# EAGLE board STM32f407layout_nonintegrated (EAGLE 7.5.0)
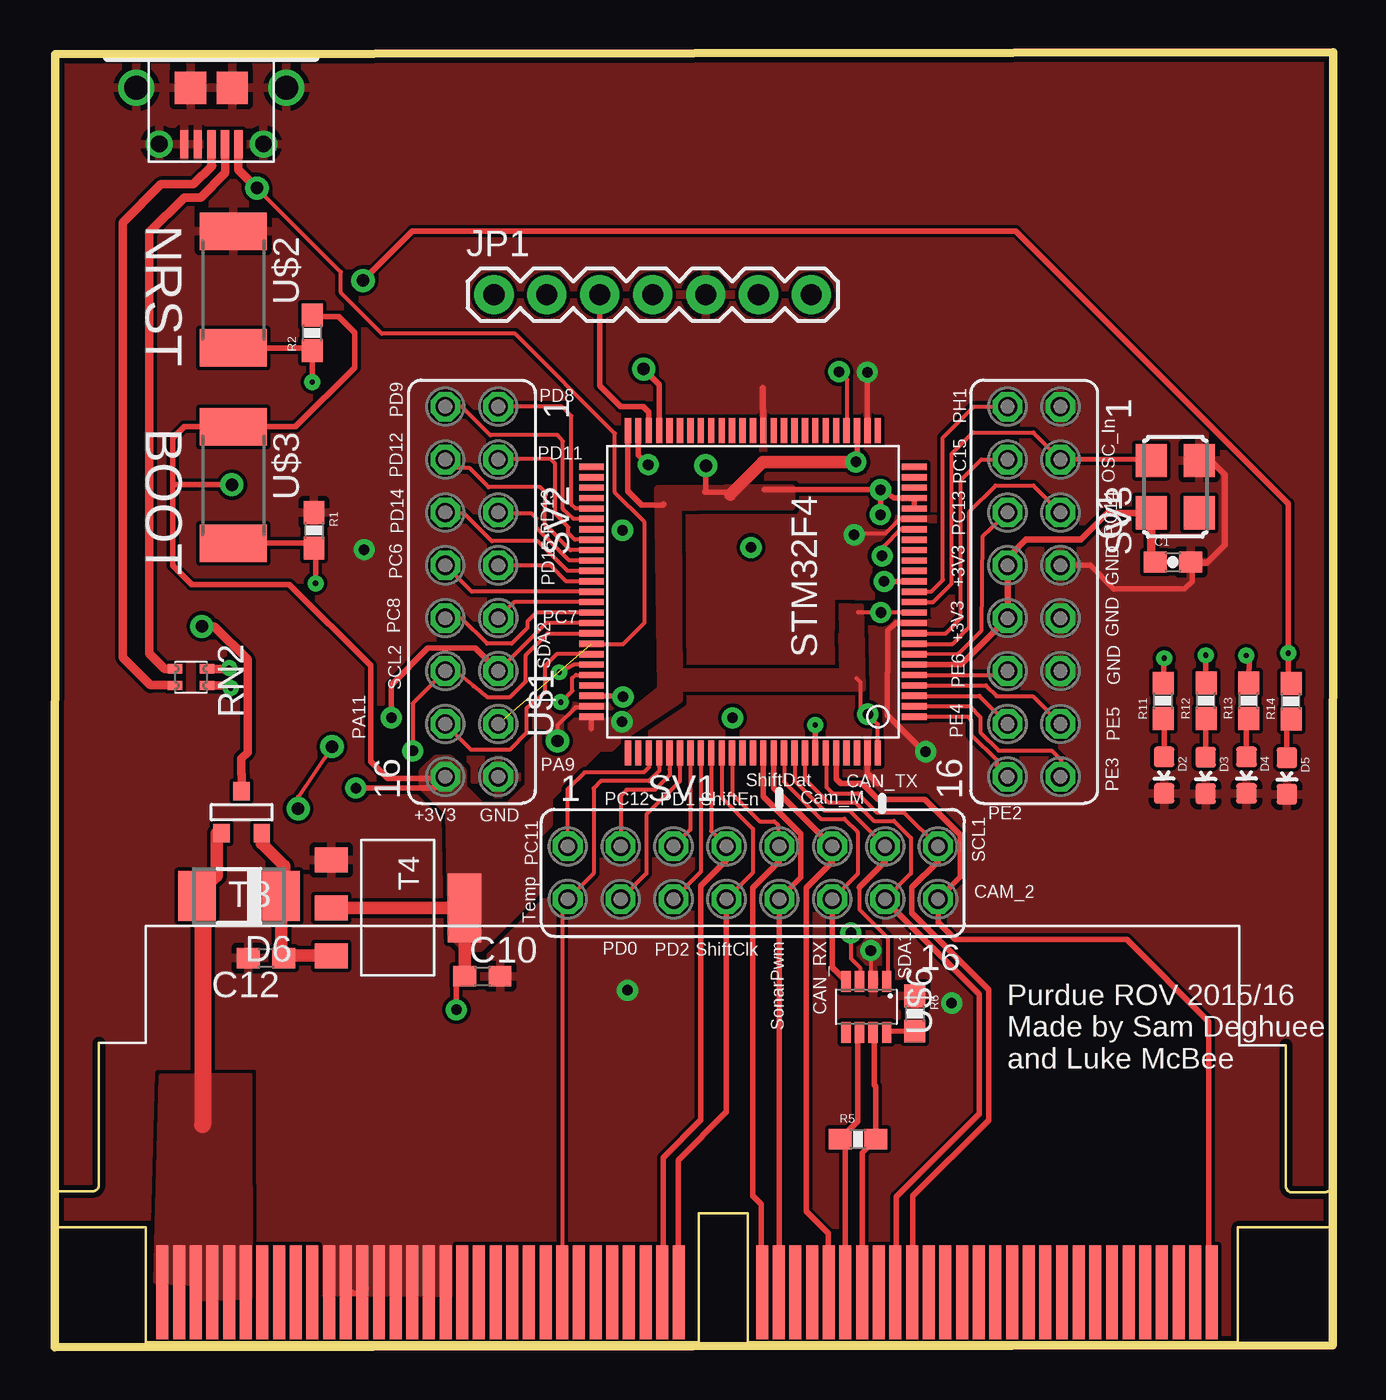
[diagram p0: board, top side]
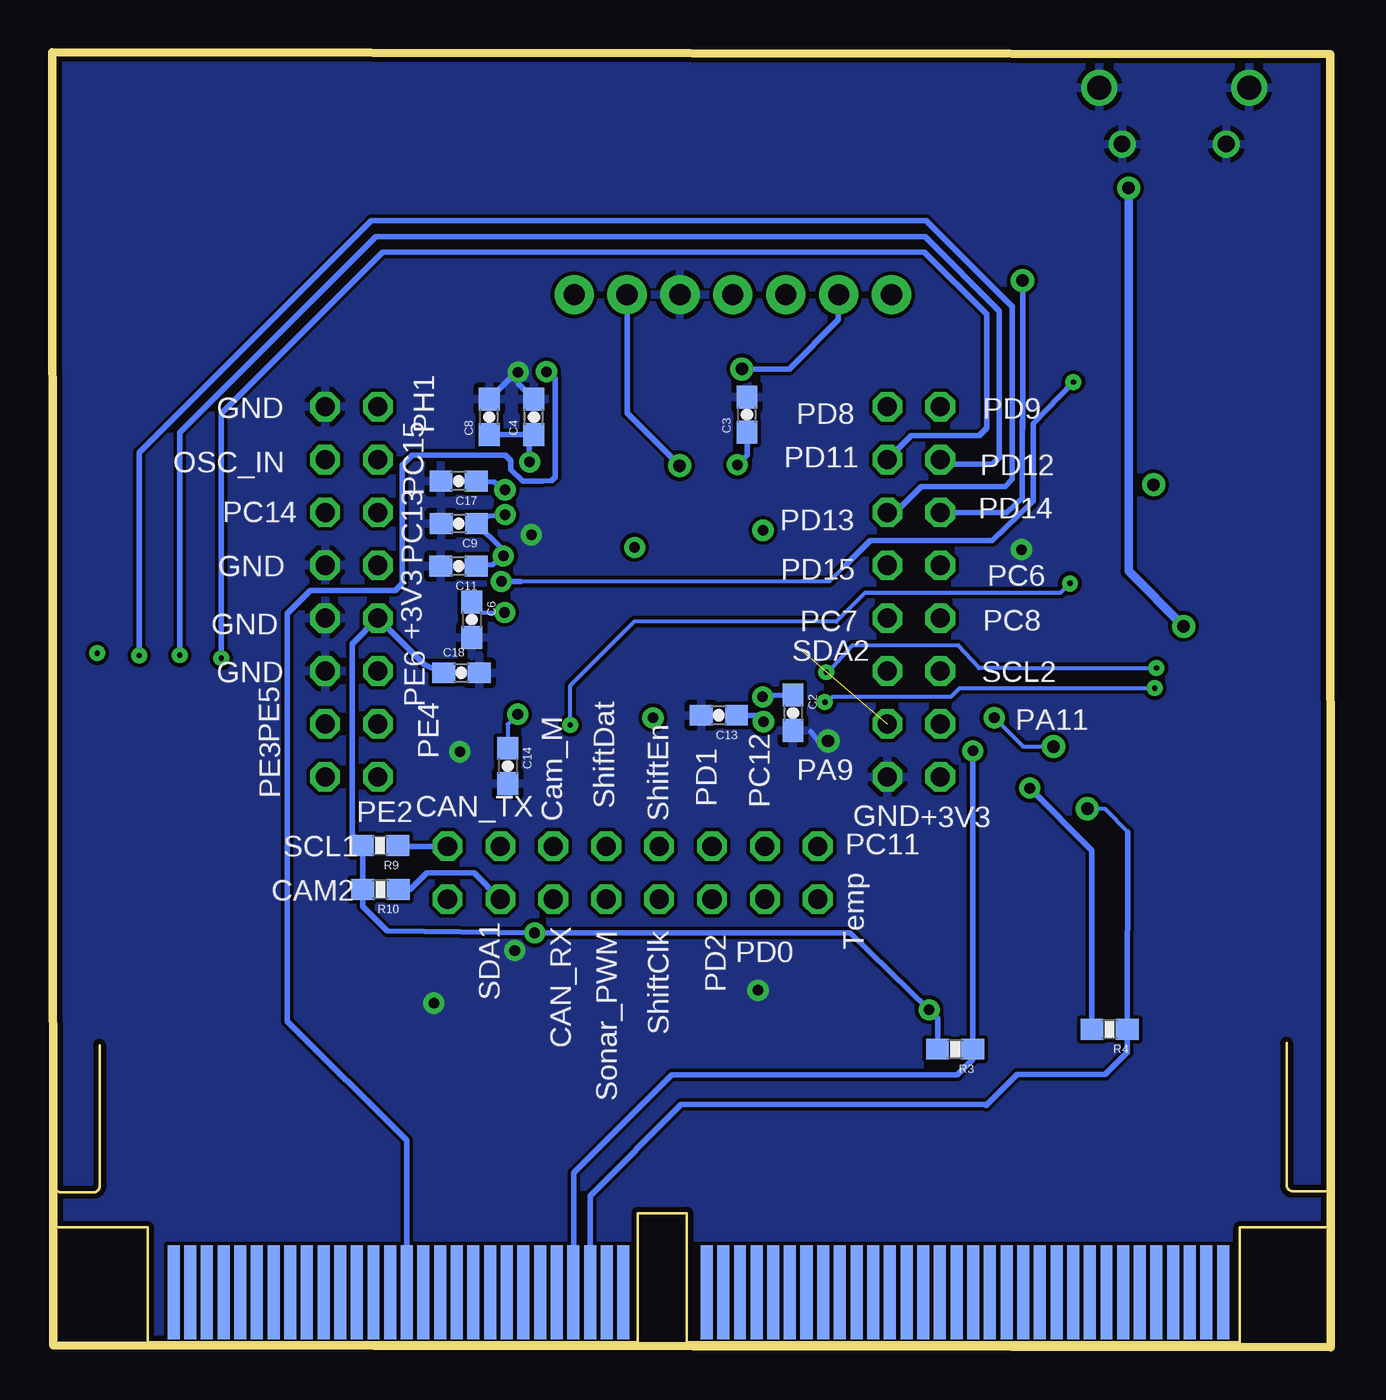
[diagram p1: board, bottom side, seen from below]

Size 61.4 x 62.23 mm. Coordinates in mm from the lower left corner, seen from the top.
Outline: 0,0 0.02,62.13 61.4,62.23 61.36,0.1 0,0
Copper layers (1*16): Top 0.035mm / dielectric 1.5mm / Bottom 0.035mm
Design rules "GoldPhoenix": minimum track width 7mil, minimum drill 10mil, track to track 7mil, track to pad 7mil, pad to pad 7mil, via to via 7mil, smd to smd 7mil, copper to edge 10mil, drill to drill 8mil, minimum pad ring 10mil, minimum via ring 10mil, stop-mask expansion 4mil, vias tented up to drill 25mil, thermal gap 10mil
Net classes: 1 DiffPair: width 0.254 mm

## Footprints (pad centres in the part's own frame; a part is rotated, then mirrored left to right if it is on the bottom)
0603-CAP = smd 1.1 x 1: 1 -0.85,0; 2 0.85,0
C0603 = smd 1.1 x 1: 1 -0.85,0; 2 0.85,0
LED-0603 = smd 1 x 1: A 0,-0.877; C 0,0.877
DO-214AC = smd 1.8 x 2.4: A 2.025,0; C -2.025,0
1X07 = drill 1.016 pad 1.88: 1 0,0; 2 2.54,0; 3 5.08,0; 4 7.62,0; 5 10.16,0; 6 12.7,0; 7 15.24,0
ASF = smd 1.6 x 1.5: 1 -1.25,-1.15; 2 1.25,-1.15; 3 1.25,1.15; 4 -1.25,1.15
0603-RES = smd 1.1 x 1: 1 -0.85,0; 2 0.85,0
EXBV4V = smd 0.45 x 0.7: 1 -0.4,-0.775; 2 0.4,-0.775; 3 0.4,0.775; 4 -0.4,0.775
FE08-2 = drill 0.914 octagon: 1 -8.89,1.27; 2 -8.89,-1.27; 3 -6.35,1.27; 4 -6.35,-1.27; 5 -3.81,1.27; 6 -3.81,-1.27; 7 -1.27,1.27; 8 -1.27,-1.27; 9 1.27,1.27; 10 1.27,-1.27; 11 3.81,1.27; 12 3.81,-1.27; 13 6.35,1.27; 14 6.35,-1.27; 15 8.89,1.27; 16 8.89,-1.27
SOT-23 = smd 0.787 x 0.889: 1 0.025,-1.016; 2 -0.94,1.016; 3 0.991,1.016
SOT223 = smd 1.2 x 1.6: GND -2.3,-3.2; VIN 2.3,-3.2; VOUT 0,-3.2 | smd 3.3 x 1.6: TAB 0,3.2
LQFP100 = smd 0.3 x 1.2: P1 -6,-7.75; P2 -5.5,-7.75; P3 -5,-7.75; P4 -4.5,-7.75; P5 -4,-7.75; P6 -3.5,-7.75; P7 -3,-7.75; P8 -2.5,-7.75; P9 -2,-7.75; P10 -1.5,-7.75; P11 -1,-7.75; P12 -0.5,-7.75; P13 0,-7.75; P14 0.5,-7.75; P15 1,-7.75; P16 1.5,-7.75; P17 2,-7.75; P18 2.5,-7.75; P19 3,-7.75; P20 3.5,-7.75; P21 4,-7.75; P22 4.5,-7.75; P23 5,-7.75; P24 5.5,-7.75; P25 6,-7.75; P51 6,7.75; P52 5.5,7.75; P53 5,7.75; P54 4.5,7.75; P55 4,7.75; P56 3.5,7.75; P57 3,7.75; P58 2.5,7.75; P59 2,7.75; P60 1.5,7.75; P61 1,7.75; P62 0.5,7.75; P63 0,7.75; P64 -0.5,7.75; P65 -1,7.75; P66 -1.5,7.75; P67 -2,7.75; P68 -2.5,7.75; P69 -3,7.75; P70 -3.5,7.75; P71 -4,7.75; P72 -4.5,7.75; P73 -5,7.75; P74 -5.5,7.75; P75 -6,7.75 | smd 1.2 x 0.3: P26 7.75,-6; P27 7.75,-5.5; P28 7.75,-5; P29 7.75,-4.5; P30 7.75,-4; P31 7.75,-3.5; P32 7.75,-3; P33 7.75,-2.5; P34 7.75,-2; P35 7.75,-1.5; P36 7.75,-1; P37 7.75,-0.5; P38 7.75,0; P39 7.75,0.5; P40 7.75,1; P41 7.75,1.5; P42 7.75,2; P43 7.75,2.5; P44 7.75,3; P45 7.75,3.5; P46 7.75,4; P47 7.75,4.5; P48 7.75,5; P49 7.75,5.5; P50 7.75,6; P76 -7.75,6; P77 -7.75,5.5; P78 -7.75,5; P79 -7.75,4.5; P80 -7.75,4; P81 -7.75,3.5; P82 -7.75,3; P83 -7.75,2.5; P84 -7.75,2; P85 -7.75,1.5; P86 -7.75,1; P87 -7.75,0.5; P88 -7.75,0; P89 -7.75,-0.5; P90 -7.75,-1; P91 -7.75,-1.5; P92 -7.75,-2; P93 -7.75,-2.5; P94 -7.75,-3; P95 -7.75,-3.5; P96 -7.75,-4; P97 -7.75,-4.5; P98 -7.75,-5; P99 -7.75,-5.5; P100 -7.75,-6
SW_2512 = smd 1.8 x 3.2: 1 -2.8,0; 2 2.8,0
MICRO_B = smd 1.5 x 1.55: GND1 -1,1.45; GND2 1,1.45 | drill 0.8: GND3 -2.5,4.15; GND4 2.5,4.15 | drill 1.15: GND7 -3.598,1.45; GND8 3.598,1.45 | smd 0.4 x 1.35: P1 -1.3,4.15; P2 -0.65,4.15; P3 0,4.15; P4 0.65,4.15; P5 1.3,4.15
SOT23-8L = smd 0.45 x 1: 1 -0.975,-1.225; 2 -0.325,-1.225; 3 0.325,-1.225; 4 0.975,-1.225; 5 0.975,1.225; 6 0.325,1.225; 7 -0.325,1.225; 8 -0.975,1.225
HSC8-60PINOUUT = smd 0.575 x 4.5 bottom: B1 0.8,2.4; B2 1.6,2.4; B3 2.4,2.4; B4 3.2,2.4; B5 4,2.4; B6 4.8,2.4; B7 5.6,2.4; B8 6.4,2.4; B9 7.2,2.4; B10 8,2.4; B11 8.8,2.4; B12 9.6,2.4; B13 10.4,2.4; B14 11.2,2.4; B15 12,2.4; B16 12.8,2.4; B17 13.6,2.4; B18 14.4,2.4; B19 15.2,2.4; B20 16,2.4; B21 16.8,2.4; B22 17.6,2.4; B23 18.4,2.4; B24 19.2,2.4; B25 20,2.4; B27 21.6,2.4; B28 22.4,2.4; B29 23.2,2.4; B30 24,2.4; B31 24.8,2.4; B32 25.6,2.4; B33 29.6,2.4; B34 30.4,2.4; B35 31.2,2.4; B36 32,2.4; B37 32.8,2.4; B38 33.6,2.4; B39 34.4,2.4; B40 35.2,2.4; B41 36,2.4; B42 36.8,2.4; B43 37.6,2.4; B44 38.4,2.4; B45 39.2,2.4; B46 40,2.4; B47 40.8,2.4; B48 41.6,2.4; B49 42.4,2.4; B50 43.2,2.4; B51 44,2.4; B52 44.8,2.4; B53 45.6,2.4; B54 46.4,2.4; B55 47.2,2.4; B56 48,2.4; B57 48.8,2.4; B58 49.6,2.4; B59 50.4,2.4; B60 51.2,2.4 | smd 0.6 x 4.5 bottom: B26 20.8,2.4 | smd 0.575 x 4.5: T1 0.8,2.4; T2 1.6,2.4; T3 2.4,2.4; T4 3.2,2.4; T5 4,2.4; T6 4.8,2.4; T7 5.6,2.4; T8 6.4,2.4; T9 7.2,2.4; T10 8,2.4; T11 8.8,2.4; T12 9.6,2.4; T13 10.4,2.4; T14 11.2,2.4; T15 12,2.4; T16 12.8,2.4; T17 13.6,2.4; T18 14.4,2.4; T19 15.2,2.4; T20 16,2.4; T21 16.8,2.4; T22 17.6,2.4; T23 18.4,2.4; T24 19.2,2.4; T25 20,2.4; T26 20.8,2.4; T27 21.6,2.4; T28 22.4,2.4; T29 23.2,2.4; T30 24,2.4; T31 24.8,2.4; T32 25.6,2.4; T33 29.6,2.4; T34 30.4,2.4; T35 31.2,2.4; T36 32,2.4; T37 32.8,2.4; T38 33.6,2.4; T39 34.4,2.4; T40 35.2,2.4; T41 36,2.4; T42 36.8,2.4; T43 37.6,2.4; T44 38.4,2.4; T45 39.2,2.4; T46 40,2.4; T47 40.8,2.4; T48 41.6,2.4; T49 42.4,2.4; T50 43.2,2.4; T51 44,2.4; T52 44.8,2.4; T53 45.6,2.4; T54 46.4,2.4; T55 47.2,2.4; T56 48,2.4; T57 48.8,2.4; T58 49.6,2.4; T59 50.4,2.4; T60 51.2,2.4

## Placement (x,y rotation side)
C1  [0603-CAP]  53.69,37.73 0 top
C2  0.22uF  [0603-CAP]  25.83,30.49 270 bottom
C3  0.22uF  [0603-CAP]  28.03,44.81 90 bottom
C4  0.1uF  [0603-CAP]  38.26,44.71 90 bottom
C6  0.1uF  [0603-CAP]  41.25,34.96 270 bottom
C8  4.7uF  [0603-CAP]  40.41,44.7 90 bottom
C9  0.1uF  [0603-CAP]  41.87,39.58 180 bottom
C10  0.22uF  [C0603]  20.53,17.83 0 top
C11  0.1uF  [0603-CAP]  41.88,37.53 180 bottom
C12  0.22uF  [C0603]  10.15,18.7 180 top
C13  0.1uF  [0603-CAP]  29.39,30.37 180 bottom
C14  0.1uF  [0603-CAP]  39.52,27.94 270 bottom
C17  1uF  [0603-CAP]  41.88,41.62 180 bottom
C18  0.1uF  [0603-CAP]  41.74,32.41 0 bottom
D2  [LED-0603]  53.27,27.5 180 top
D3  [LED-0603]  55.27,27.48 180 top
D4  [LED-0603]  57.22,27.5 180 top
D5  [LED-0603]  59.17,27.45 180 top
D6  [DO-214AC]  8.84,21.69 180 top
JP1  [1X07]  21.09,50.58 0 top
Q1  ASF  [ASF]  53.81,41.35 90 top
R1  10k  [0603-RES]  12.44,39.26 270 top
R2  10k  [0603-RES]  12.36,48.74 90 top
R3  4.7K  [0603-RES]  18.03,14.33 180 bottom
R4  4.7K  [0603-RES]  10.61,15.29 180 bottom
R5  120  [0603-RES]  38.57,10.01 0 top
R6  100K  [0603-RES]  41.29,16.05 270 top
R9  4.7K  [0603-RES]  45.64,24.11 180 bottom
R10  4.7K  [0603-RES]  45.63,22.01 180 bottom
R11  200  [0603-RES]  53.23,31.06 90 top
R12  200  [0603-RES]  55.29,31.07 90 top
R13  200  [0603-RES]  57.33,31.07 90 top
R14  200  [0603-RES]  59.37,31.05 90 top
RN2  [EXBV4V]  6.54,32.2 270 top
SV1  [FE08-2]  33.52,22.81 0 top
SV2  [FE08-2]  20.02,36.31 270 top
SV3  [FE08-2]  47.02,36.31 270 top
T3  FDN340P  [SOT-23]  9,25.72 180 top
T4  AP1117_LIN_REG  [SOT223]  16.47,21.12 270 top
U$1  STM32F4  [LQFP100]  33.52,36.31 90 top
U$2  SWITCH  [SW_2512]  8.56,50.82 270 top
U$3  SWITCH  [SW_2512]  8.56,41.43 270 top
U$5  MICROUSB  [MICRO_B]  7.52,61.96 180 top
U$6  MAX3051MAX3051  [SOT23-8L]  38.97,16.37 180 top
U$8  HSC8PART-60  [HSC8-60PINOUUT]  4.37,0.25 0 top

## Library data of the parts
C1-C4 C6 C8 C9 C11 C13 C14 C17 C18 R1-R6 R9-R14 = SparkFun-Passives
C10 C12 = rcl
D2-D5 = SparkFun-LED
D6 U$2 U$3 = DiscreteComponents
JP1 U$8 = Connectors
Q1 = DiscreteComponents; DIGIKEY: 535-10066-1-ND
RN2 = DiscreteComponents; DIGIKEY: RHM1381CT-ND; MF: Rohm Semiconductor; MPN: MNR12ERAPJ220
SV1-SV3 = con-lsta; OC_FARNELL: unknown; OC_NEWARK: unknown
T3 = DiscreteComponents; DIGIKEY: FDN340PCT-ND
T4 = PowerComponents
U$1 U$5 = Other
U$6 = MAX3051 Library

## Nets
+3V3: C1.1 C4.1 C6.1 C8.1 C9.1 C10.1 C11.1 C13.1 C14.1 C17.1 C18.1 JP1.6 Q1.4 R2.2 R3.2 R4.2 R9.2 R10.2 SV2.16 SV3.8 SV3.10 T4.TAB T4.VOUT U$1.P6 U$1.P11 U$1.P19 U$1.P21 U$1.P22 U$1.P28 U$1.P50 U$1.P75 U$1.P100 U$3.1 U$6.3
+5V: D6.A T3.3 U$8.T1 U$8.T2 U$8.T3 U$8.T4 U$8.T5 U$8.T6
ALT_CAMERA_SERVO_MOTOR_PWM: SV1.16 U$1.P96 U$8.T60
CAN_RX: SV1.12 U$1.P91 U$6.4
CAN_TX: SV1.13 U$1.P92 U$6.1
CANH1: R5.2 U$6.7 U$8.T39
CANL1: R5.1 U$6.6 U$8.T38
CFG: JP1.1
CRS_DV: U$1.P32
GND: C1.2 C2.2 C3.2 C4.2 C6.2 C8.2 C9.2 C10.2 C11.2 C12.2 C13.2 C14.2 C17.2 C18.2 D2.C D3.C D4.C D5.C JP1.5 Q1.2 R1.1 R6.1 SV2.15 SV3.1 SV3.7 SV3.9 SV3.11 T4.GND U$1.P10 U$1.P20 U$1.P27 U$1.P37 U$1.P74 U$1.P99 U$2.1 U$5.GND1 U$5.GND2 U$5.GND3 U$5.GND4 U$5.GND7 U$5.GND8 U$5.P4 U$5.P5 U$6.2 U$8.T11 U$8.T12 U$8.T13 U$8.T14 U$8.T15 U$8.T16 U$8.T17 U$8.T18
I2C1_SCL: R9.1 SV1.15 U$1.P95 U$8.T42
I2C1_SDA: R10.1 SV1.14 U$1.P93 U$8.T41
I2C3_SCL: R3.1 SV2.12 U$1.P67 U$8.B36
I2C3_SDA: R4.1 SV2.11 U$1.P66 U$8.B35
MAIN_CAMERA_SERVO_MOTOR_PWM: SV1.11 U$1.P90 U$8.T37
N$1: C2.1 U$1.P73
N$2: C3.1 U$1.P49
N$3: R1.2 U$1.P94 U$3.2
N$4: R2.1 U$1.P14 U$2.2
N$11: R6.2 U$6.8
N$12: RN2.1 U$5.P2
N$14: D3.A R12.1
N$15: D5.A R14.1
N$17: D4.A R13.1
N$18: D2.A R11.1
N$24: RN2.2 U$5.P3
N$58: C12.1 D6.C T3.2 T4.VIN
OSC_IN: Q1.3 SV3.3 U$1.P12
PA0: U$1.P23
PA3: U$1.P26
PA5: U$1.P30
PA6: U$1.P31
PA10: SV2.14 U$1.P69
PA13: U$1.P72
PA14: U$1.P76
PA15: U$1.P77
PB0: U$1.P35
PB1: U$1.P36
PB14: U$1.P53
PB15: U$1.P54
PC0: U$1.P15
PC2: U$1.P17
PC3: U$1.P18
PC6: SV2.8 U$1.P63
PC7: SV2.9 U$1.P64
PC8: SV2.10 U$1.P65
PC10: SV1.1 U$1.P78
PC12: SV1.3 U$1.P80
PC13: SV3.6 U$1.P7
PC14: SV3.5 U$1.P8
PC15: SV3.4 U$1.P9
PD0: SV1.4 U$1.P81
PD1: SV1.5 U$1.P82
PD2: SV1.6 U$1.P83
PD6: U$1.P87
PD7: U$1.P88
PD8: SV2.1 U$1.P55
PD9: SV2.2 U$1.P56
PD10: U$1.P57
PD11: R11.2 SV2.3 U$1.P58
PD12: R12.2 SV2.4 U$1.P59
PD13: R13.2 SV2.5 U$1.P60
PD14: R14.2 SV2.6 U$1.P61
PD15: SV2.7 U$1.P62
PE0: U$1.P97
PE1: U$1.P98
PE2: SV3.16 U$1.P1
PE3: SV3.15 U$1.P2
PE4: SV3.14 U$1.P3
PE5: SV3.13 U$1.P4
PE6: SV3.12 U$1.P5
PE7: U$1.P38
PE8: U$1.P39
PE9: U$1.P40
PE10: U$1.P41
PE11: U$1.P42
PE12: U$1.P43
PE13: U$1.P44
PE14: U$1.P45
PE15: U$1.P46
PH1: SV3.2 U$1.P13
RST_ETH: JP1.4
RXD0: U$1.P33
RXD1: U$1.P34
SHIFTREG_CLK: SV1.8 U$1.P85 U$8.T32
SHIFTREG_DATA: SV1.9 U$1.P86 U$8.T33
SHIFTREG_ENABLE: SV1.7 U$1.P84 U$8.T31
SONAR_DAC: U$1.P29 U$8.B46
SONAR_PWM: SV1.10 U$1.P89 U$8.T34
TEMP_BACKUP: SV1.2 U$1.P79 U$8.T25
USART3_RX: JP1.3 U$1.P48
USART3_TX: JP1.2 U$1.P47
USB_D+: RN2.3 U$1.P71
USB_D-: RN2.4 U$1.P70
USBPWR: SV2.13 T3.1 U$1.P68 U$5.P1
VDD_ETH: JP1.7

## Tracks (layer width: path | path; a pad name or v marks a point on that pad's centre or on a via)
+3V3  (via drill 0.51, 0.6)
  Top 0.203: v38.23,19.92 38.22,18.68 38.67,18.24 38.67,17.61 U$6.3 | U$1.P19 40.63,39.31 39.8,38.48 39.76,38.23 v39.73,38.02 | U$1.P100 39.52,29.93 v39.04,30.42 38.7,30.76 38.69,30.76 38.69,31.95 38.49,32.15 | U$1.P11 41.26,35.31 v39.67,35.31 v39.66,35.31 38.56,35.31
  Top 0.254: U$1.P75 25.75,30.31 25.75,29.74 | U$1.P50 27.5,42.89 27.5,41.15 28.18,40.47 29.19,40.47 29.24,40.51 | 5.67,41.53 5.67,43.68 6.22,44.23 U$3.1 11.55,44.23 14.4,47.08 14.4,48.75 13.63,49.52 12.43,49.52 R2.2 | 5.67,41.53 5.67,37.57 6.58,36.65 11.26,36.65 15.16,32.75 15.16,28.16 15.99,27.33 18.67,27.33 SV2.16 18.21,26.88 v14.45,26.88 | v39.65,41.2 39.71,41.16 39.75,41.17 40.31,40.81 U$1.P22 U$1.P21 | U$1.P28 38.52,42.56 v38.47,42.54 | v19.29,16.22 19.29,17.44 C10.1 | v8.5,41.45 5.74,41.45 5.67,41.53 | U$1.P6 43.52,32.81 SV3.10 | v39.64,40.01 39.65,40.12 v39.65,41.2 | 34.06,41.2 v39.65,41.2 | v31.26,42.36 31.26,41.14 31.22,41.1 32.31,41.1 32.44,40.97
  Top 0.305: Q1.4 50.55,40.08 49.28,38.81 46.63,38.81 45.75,37.93 SV3.8 SV3.10
  Top 0.406: Q1.4 52.66,37.92 C1.1
  Top 0.61: T4.VOUT T4.TAB C10.1 | v38.47,42.54 34,42.54 32.44,40.97
  Bottom 0.203: v39.04,30.42 39.53,29.94 C14.1 | C6.1 40.75,35.31 v39.67,35.31
  Bottom 0.254: v38.47,42.54 38.52,43.8 C4.1 C8.1 | C17.1 40.16,41.56 v39.65,41.2 | C13.1 27.55,30.37 v27.23,30.06 | R4.2 11.46,23.89 v14.45,26.88 | C11.1 40.25,37.61 v39.73,38.02 39.84,38.4 C9.1 40.68,39.92 v39.64,40.01 | R3.2 18.88,15.82 v19.29,16.22 23.08,19.92 v38.23,19.92 45.3,20.01 46.49,21.2 R10.2 R9.2 46.99,24.61 46.99,33.8 SV3.10 43.52,32.81 C18.1 | JP1.6 33.79,44.89 v31.26,42.36
  pour Top (no thermals): 18.94,25.69 17.68,26.95 17.68,27.64 18.32,28.28 18.96,28.28 19.58,27.66 19.58,26.88 20.45,26.01 21.82,26.01 22.76,26.95 22.76,28.9 23.79,29.93 23.79,29.93 24.16,30.07 26.55,30.04 27.54,30.35 29.11,31.63 28.98,41.24 35.37,41.29 35.37,40.4 31.37,40.41 30.24,40.38 29.91,40.4 29.95,31.12 27.48,29.5 27.37,29.5 26.7,28.83 26.13,28.83 23.72,26.43 23.72,25.14 23.13,24.55 23.13,21.91 20.4,19.19 19.69,19.19 19.03,19.85 19.03,21.09
  pour Top: 29.78,31.62 38.87,31.62 38.77,35.62 37.71,35.66 37.73,34.19 37.69,34.25 37.74,32.51 29.76,32.51 29.76,31.61
+5V
  Top 0.254: D6.A | T3.3 7.78,24.7
  Top 0.61: 7.78,24.7 7.78,22.65 D6.A
  Top 0.813: D6.A 7.09,21.69 7.09,10.71
  pour Top (no thermals): 6.84,2.34 9.38,2.42 9.35,13.06 5.12,13.02 4.85,3.17 6.78,3.06 6.81,2.4
ALT_CAMERA_SERVO_MOTOR_PWM
  Top 0.254: U$1.P96 37.52,27.3 37.74,27.09 38.76,27.09 39.54,26.32 41.79,26.32 43.49,24.61 43.49,22.61 SV1.16 42.41,20.42 43.24,19.59 51.47,19.59 55.42,15.64 55.42,2.79 U$8.T60
CAN_RX
  Top 0.203: U$1.P91 35.02,27.17 36.79,25.4 37.91,25.4 38.55,24.76 38.55,22.76 SV1.12
  Top 0.254: SV1.12 37.33,18.26 U$6.4
CAN_TX
  Top 0.203: U$1.P92 35.52,27.22 36.95,25.79 38.16,25.79 SV1.13 | 38.64,22.11 38.64,21.04 40,19.68 40,17.65 U$6.1
  Top 0.254: SV1.13 39.87,23.34 38.64,22.11 | 39.92,17.62 U$6.1
CANH1
  Top 0.254: U$6.7 39.35,15.09 39.35,12.61 39.42,12.54 R5.2 38.77,9.36 U$8.T39
CANL1
  Top 0.254: U$6.6 38.56,15.05 38.56,10.85 R5.1 37.97,9.76 U$8.T38
GND  (via drill 0.51, 0.6)
  Top 0.203: v39.18,19.07 39.18,17.71 U$6.2 | U$1.P74 25.72,30.75 25.01,30.75 24.14,29.88 v24.14,29.14 | U$1.P20 40.59,39.81 39.88,39.11 38.45,39.1 v38.38,39.04
  Top 0.254: SV3.7 49.72,37.58 50.86,36.44 54.27,36.46 54.62,36.8 54.62,37.66 C1.2 | U$1.P99 39.02,27.61 39.05,27.57 39.05,27.55 C14.2 | 38.4,39.05 v38.38,39.04 | U$1.P27 39.01,46.15 v39.02,46.85 | U$1.P10 40.37,34.81 40.01,34.44 39.97,30.39 41.54,28.82 | 14.29,2.65 14.29,2.66 | 14.96,2.84 14.73,2.61 14,2.61 13.82,2.79 13.82,2.65 13.91,2.56 | 15.72,2.65 15.61,2.54 15.52,2.54 15.47,2.59 15.5,2.59 15.55,2.64 | 13.91,2.65 13.9,2.65 13.98,2.65 13.99,2.67 13.92,2.67 13.88,2.71
  Top 0.305: Q1.2 55.5,42.6 56.18,41.92 56.18,38.54 55.35,37.71 54.56,37.71 C1.2 | U$1.P37 33.99,46.08
  Bottom 0.254: v38.38,39.04 38.38,38.69 38.37,38.68 | v24.14,29.14 24.62,29.14 24.96,29.59 | C8.2 39.23,46.73 39.23,46.78 v39.02,46.85 39.02,46.31 C4.2
  other vias: 14.85,38.32 41.82,28.62 27.5,17.16 43.07,16.54
  pour Bottom (rank 6): -0.01,0.13 61.26,0.16 61.37,62.4 -0.08,62.38
  pour Top (rank 6): 61.34,0.12 61.37,62.3 -0.04,62.21 -0.07,0.16
  pour Top: 13.17,2.71 16.25,2.58 16.53,2.86
  pour Top (no thermals): 13.22,2.65 19.23,2.52 19.23,8.78 12.85,8.83 12.85,2.58
I2C1_SCL
  Top 0.203: SV1.15 40.78,25.71 39.47,25.71 38.56,26.61 37.36,26.61 37.05,26.92 37.05,28.53 U$1.P95
  Top 0.254: SV1.15 42.41,23.36 41.15,22.1 41.15,20.87 44.85,17.18 44.85,10.92 41.2,7.28 41.2,2.69 U$8.T42
  Bottom 0.254: R9.1 44.75,24.07 SV1.15
I2C1_SDA
  Top 0.203: U$1.P93 36.02,27.3 37.14,26.19 38.44,26.19 39.32,25.3 40.29,25.3 41.11,24.48 41.11,22.77 SV1.14
  Top 0.254: SV1.14 39.87,21.47 44.39,16.95 44.39,11.22 40.4,7.23 40.4,2.69 U$8.T41
  Bottom 0.254: R10.1 44.2,22.01 43.41,22.8 41.14,22.8 SV1.14
I2C3_SCL  (via drill 0.51)
  Top 0.203: U$1.P67 23.66,34.3 22.61,33.25 22.61,31.99 22.6,31.98 22.58,31.98 21.84,31.23 20.79,31.23 20.11,31.77 19.18,32.51 SV2.12 17.19,30.93 v17.19,28.66
  Bottom 0.254: v17.19,28.66 17.18,28.93 R3.1 17.18,13.83 17.92,13.09 31.65,13.09 36.36,8.39 U$8.B36 36.32,2.92
I2C3_SDA  (via drill 0.51, 0.6)
  Top 0.203: U$1.P66 23.6,34.81 SV2.11 | v13.31,28.87 11.69,26.45 v11.69,25.88
  Top 0.254: v16.16,30.25 16.15,31.84 17.91,33.6 20.19,33.6 SV2.11
  Bottom 0.203: v11.69,25.88 10.85,25.88 9.74,24.77 | v16.16,30.25 14.77,28.87 v13.31,28.87
  Bottom 0.254: 9.74,24.77 R4.1 9.76,14.18 10.82,13.12 15.05,13.12 16.55,11.63 16.59,11.67 31.19,11.67 35.57,7.29 U$8.B35
MAIN_CAMERA_SERVO_MOTOR_PWM
  Top 0.254: U$1.P90 34.52,26.89 SV1.11 37.33,23.33 36.09,22.09 36.09,6.55 37.14,5.5 37.14,2.68 U$8.T37
N$1  (via drill 0.51)
  Top 0.254: U$1.P73 26.99,31.31 v27.28,31.25
  Bottom 0.254: C2.1 27.01,31.33 v27.28,31.25
N$2  (via drill 0.51)
  Top 0.254: U$1.P49 28.02,42.88 v28.5,42.41
  Bottom 0.254: v28.5,42.41 28.03,42.87 C3.1
N$3  (via drill 0.25)
  Top 0.254: U$1.P94 v36.52,29.9 | U$3.2 12.45,38.63 R1.2 12.52,38.33 v12.52,36.71
  Bottom 0.203: v36.52,29.9 36.52,31.8 36.32,31.99 33.45,34.86 23.74,34.86 22.34,36.26 12.96,36.26 v12.52,36.71
N$4  (via drill 0.25, 0.51)
  Top 0.254: U$2.2 12.36,48.02 R2.1 12.36,47.88 v12.36,46.37 | U$1.P14 v39.83,36.81 v39.83,36.8
  Bottom 0.203: 23.27,37.61 24.08,36.8 v39.83,36.8
  Bottom 0.254: 23.27,37.61 22.12,38.76 16.25,38.76 14.29,40.67 14.29,44.38 v12.36,46.37 | v39.83,36.8 38.9,36.8 38.89,36.81
N$7  (via drill 0.51)
  other vias: 27.26,39.25
N$8  (via drill 0.51)
  other vias: 32.54,30.24
N$10  (via drill 0.51)
  other vias: 33.43,38.43
N$11
  Top 0.254: R6.2 40.02,15.21 U$6.8
N$12
  Top 0.406: RN2.1 5.29,32.6 4.54,33.34 4.54,53.58 6.21,55.25 7,55.25 8.18,56.43 8.18,57.79 U$5.P2
N$14
  Top 0.254: D3.A 55.27,30.21 R12.1
N$15
  Top 0.254: D5.A 59.17,30.19 R14.1
N$17
  Top 0.254: D4.A 57.22,30.22 R13.1
N$18
  Top 0.254: D2.A 53.27,30.2 R11.1
N$24
  Top 0.406: RN2.2 5.74,31.82 4.59,31.82 3.26,33.15 3.26,54.04 5.1,55.87 6.65,55.87 7.55,56.78 7.52,56.81 U$5.P3
N$58
  Top 0.254: 13.16,18.7 T4.VIN
  Top 0.61: 10.87,18.83 T4.VIN | 10.87,18.83 D6.C 11.03,21.85 11.03,23.12 9.93,24.22 T3.2 | 10.87,18.83 C12.1
OSC_IN
  Top 0.203: U$1.P12 42.18,35.81 43.07,36.69 43.07,42.94 44.08,43.95 47,43.95 SV3.3
  Top 0.254: SV3.3 52.59,42.67 Q1.3
PA10
  Top 0.203: U$1.P69 24.1,33.31 23.54,32.74 23.54,31.45 22.65,30.7 22.65,29.52 21.84,28.71 20,28.71 SV2.14
PC6
  Top 0.203: U$1.P63 20.02,36.31 SV2.8
PC7
  Top 0.203: U$1.P64 22.06,35.81 SV2.9
PC8
  Top 0.203: U$1.P65 23.13,35.31 22.69,34.87 22.69,34.57 21.93,33.81 20.75,33.81 19.55,35.01 18.77,35.01 SV2.10
PC10
  Top 0.203: U$1.P78 28.52,27.86 28.29,27.63 25.44,27.63 24.62,26.81 24.62,24.09 SV1.1
PC12
  Top 0.203: U$1.P80 29.52,27.97 | SV1.3 27.18,26.5 27.46,26.79 28.81,26.79 29.52,27.5 29.52,27.78 29.52,27.97 | 29.52,27.97
PC13
  Top 0.203: U$1.P7 43.4,33.34 44.51,34.45 44.57,38.99 SV3.6
PC14
  Top 0.203: U$1.P8 43.11,33.81 43.92,34.62 43.92,40.16 45.18,41.42 46.99,41.42 SV3.5
PC15
  Top 0.203: U$1.P9 42.78,34.31 43.5,35.03 43.5,41.67 44.49,42.66 SV3.4
PD0
  Top 0.203: U$1.P81 30.02,27.92 30.01,27.9 30.01,27.2 28.41,25.6 28.41,22.77 SV1.4
PD1
  Top 0.203: 29.7,24.09 SV1.5 30.52,24.89 U$1.P82
PD2
  Top 0.203: U$1.P83 31.02,22.84 SV1.6
PD8
  Top 0.203: U$1.P55 25.01,40.31 24.81,40.5 24.81,44.75 24.36,45.19 SV2.1
PD9
  Top 0.203: U$1.P56 24.92,39.81 24.4,40.29 24.4,43.53 24.14,43.83 20.91,43.83 19.53,45.21 18.77,45.21 SV2.2
PD11  (via drill 0.25)
  Top 0.203: SV2.3 21.32,42.68 23.81,42.68 24,42.49 24,40.08 24.67,39.41 24.67,39.11 24.97,38.81 U$1.P58
  Top 0.254: R11.2 v53.27,33.1 v53.28,33.11
  Bottom 0.254: 53.28,33.22 v53.28,33.11 53.28,44.87 45.52,52.63 19.51,52.63 16.52,49.64 16.52,44.16 16.87,43.81 20.14,43.81 SV2.3
PD12  (via drill 0.25)
  Top 0.203: SV2.4 19.17,42.23 19.93,42.23 20.83,41.33 23.32,41.33 23.56,41.08 23.52,39.55 24.76,38.31 U$1.P59
  Top 0.254: R12.2 55.25,33.23 v55.27,33.25
  Bottom 0.254: SV2.4 18.53,42.43 16.23,42.43 15.91,42.75 15.91,44.88 15.91,44.89 15.91,49.79 19.48,53.36 45.85,53.36 55.27,43.94 v55.27,33.25
PD13  (via drill 0.25)
  Top 0.203: U$1.P60 24.71,37.81 23.13,39.38 23.13,39.83 22.91,40.06 21.35,40.06 SV2.5
  Top 0.254: R13.2 57.35,33.23 v57.21,33.24
  Bottom 0.254: SV2.5 20.9,40.11 19.67,41.35 15.64,41.35 15.29,41.71 15.29,49.99 19.42,54.13 46.07,54.13 57.21,42.98 v57.21,33.24
PD14  (via drill 0.25, 0.6)
  Top 0.203: U$1.P61 24.62,37.31 23.2,38.73 20.99,38.73 19.66,40.06 18.81,40.06 SV2.6
  Top 0.254: R14.2 59.23,31.96 v59.23,33.36 59.23,40.55 46.14,53.63 17.17,53.63 v14.8,51.26
  Bottom 0.254: SV2.6 15.55,40.11 14.81,40.81 14.81,44.13 | 14.81,44.13 14.81,44.53 | v14.8,51.26 14.8,44.14 14.81,44.13
PD15
  Top 0.203: U$1.P62 24.56,36.81 23.82,37.55 21.32,37.55 SV2.7
PE2
  Top 0.203: U$1.P1 43.83,30.31 44.02,30.12 44.02,29.43 45.23,28.22 45.23,27.94 SV3.16
PE3
  Top 0.203: U$1.P2 43.93,30.81 44.45,30.28 44.45,29.55 45.32,28.68 47.87,28.68 48.32,28.22 48.32,27.45 SV3.15
PE4
  Top 0.203: U$1.P3 44.4,31.31 SV3.14
PE5
  Top 0.203: U$1.P4 44.71,31.81 45.23,31.29 46.95,31.29 SV3.13
PE6
  Top 0.203: U$1.P5 43.42,32.31 45.46,32.3 45.73,32.52 SV3.12
PH1
  Top 0.203: 45.72,45.22 SV3.2 | 45.69,45.26 SV3.2 | SV3.2 44.12,45.19 42.65,43.72 42.65,36.87 42.08,36.31 U$1.P13
RXD0
  Top 0.254: U$1.P33
RXD1
  Top 0.254: U$1.P34 35.51,44.07
SHIFTREG_CLK
  Top 0.203: U$1.P85 32.02,26.41 33.52,24.91 33.52,22.8 SV1.8
  Top 0.254: SV1.8 32.25,11.31 29.94,9 29.94,2.68 U$8.T32
SHIFTREG_DATA
  Top 0.203: U$1.P86 32.52,26.6 33.84,25.28 34.54,25.28 34.73,25.09 34.73,24.14 SV1.9
  Top 0.254: SV1.9 34.79,23.35 33.52,22.07 33.52,7.29 33.94,6.88 33.94,2.68 U$8.T33
SHIFTREG_ENABLE
  Top 0.203: U$1.P84 31.52,24.8 SV1.7
  Top 0.254: SV1.7 32.25,23.4 31.03,22.18 31.03,10.94 29.21,9.12 29.21,2.7 U$8.T31
SONAR_DAC  (via drill 0.51)
  Top 0.203: 38.06,44.09 38.06,46.47 v37.66,46.87
  Top 0.254: U$1.P29 38.06,44.09
  Bottom 0.254: v37.66,46.87 37.63,46.85 37.62,46.85 37.24,46.54 37.24,41.81 37.41,41.63 37.87,41.61 38.47,41.61 38.56,41.61 38.81,41.61 39.37,42.17 39.37,42.61 39.64,42.87 44.11,42.86 44.59,42.38 44.59,36.69 44.93,36.35 49,36.35 50.1,35.25 50.1,15.68 44.37,9.94 U$8.B46
SONAR_PWM
  Top 0.254: U$1.P89 34.02,26.48 35.83,24.67 35.83,22.57 SV1.10 34.79,2.68 U$8.T34
TEMP_BACKUP
  Top 0.203: U$1.P79 29.02,27.89 29.03,27.88 29.03,27.7 28.53,27.2 26.22,27.2 25.87,26.86 25.87,22.78 SV1.2 24.37,21.27 U$8.T25
USART3_RX
  Top 0.254: JP1.3 26.16,50.56 26.16,46.21 27.17,45.2 28.25,45.2 28.52,44.93 U$1.P48
USART3_TX  (via drill 0.6)
  Top 0.254: U$1.P47 29.02,46.27 v28.28,47.01
  Top 0.406: JP1.2 23.71,50.58
  Bottom 0.254: v28.28,47.01 26.01,47.01 23.64,49.37 23.64,50.56 JP1.2
USB_D+  (via drill 0.25)
  Top 0.203: v24.29,31 24.86,31.55 24.86,32.18 25.02,32.31 U$1.P71
  Top 0.406: RN2.3 8.45,31.8 v8.45,31.67
  Bottom 0.203: v24.29,31 23.92,31.25 18.24,31.25 17.82,31.67 v8.45,31.67
USB_D-  (via drill 0.25)
  Top 0.203: U$1.P70 24.93,32.81 v24.22,32.44
  Top 0.406: RN2.4 8.37,32.6 v8.37,32.64
  Bottom 0.203: v24.22,32.44 24.13,32.45 22.97,33.72 17.87,33.72 16.89,32.63 15.46,32.63 15.43,32.64 v8.37,32.64
USBPWR  (via drill 0.6)  (1 unrouted)
  Top 0.203: 9.25,33.04 9.25,28.88 9.28,28.85 | 25.8,33.77 arc-90 U$1.P68 25.76,33.79 | SV2.13 21.32,29.96 | 25.74,33.77 25.76,33.79 | 25.76,33.79 27.29,33.79 28.32,34.82 28.32,39.64 26.9,41.06 26.9,43.91 22.11,48.7 15.71,48.7 13.74,50.66 13.74,51.66 v9.71,55.69
  Top 0.406: T3.1 8.97,27.52 8.96,27.52 8.96,28.3 9.25,28.59 9.25,33.04 7.66,34.64 v7.06,34.64 | U$5.P1 8.82,56.58 v9.71,55.69
  Bottom 0.406: v9.71,55.69 9.71,37.29 v7.06,34.64

## Text on the board
tPlace: NRST | PD9 | PD8 | BOOT | PH1 | PD11 | PD12 | OSC_In | PC15 | PD14 | PD13 | PC13 | PC14 | PC6 | PD15 | GND | +3V3 | PC7 | PC8 | +3V3 | GND | SDA2 | SCL2 | PE6 | GND | PA11 | PE4 | PE5 | PA9 | ShiftDat | CAN_TX | PE3 | PC12 | PD1 | ShiftEn | Cam_M | +3V3 | GND | PC11 | SCL1 | CAM_2 | Temp | PD0 | PD2 | ShiftClk | SonarPwm | CAN_RX | SDA1
bPlace: GND | PD9 | PD8 | PH1 | OSC_IN | PD12 | PD11 | PC15 | PD14 | PC14 | PD13 | PC13 | GND | PC6 | PD15 | +3V3 | GND | PC8 | PC7 | SDA2 | PE6 | GND | SCL2 | PE4 | PA11 | PE5 | PA9 | PC12 | PD1 | ShiftDat | PE3 | +3V3 | GND | ShiftEn | Cam_M | CAN_TX | PE2 | PC11 | SCL1 | CAM2 | PD2 | ShiftClk | Sonar_PWM | CAN_RX | SDA1 | Temp | PD0
_tsilk: PE2 | Purdue ROV 2015/16 / Made by Sam Deghuee / and Luke McBee